# EAGLE board RFID1284 (EAGLE 6.2)
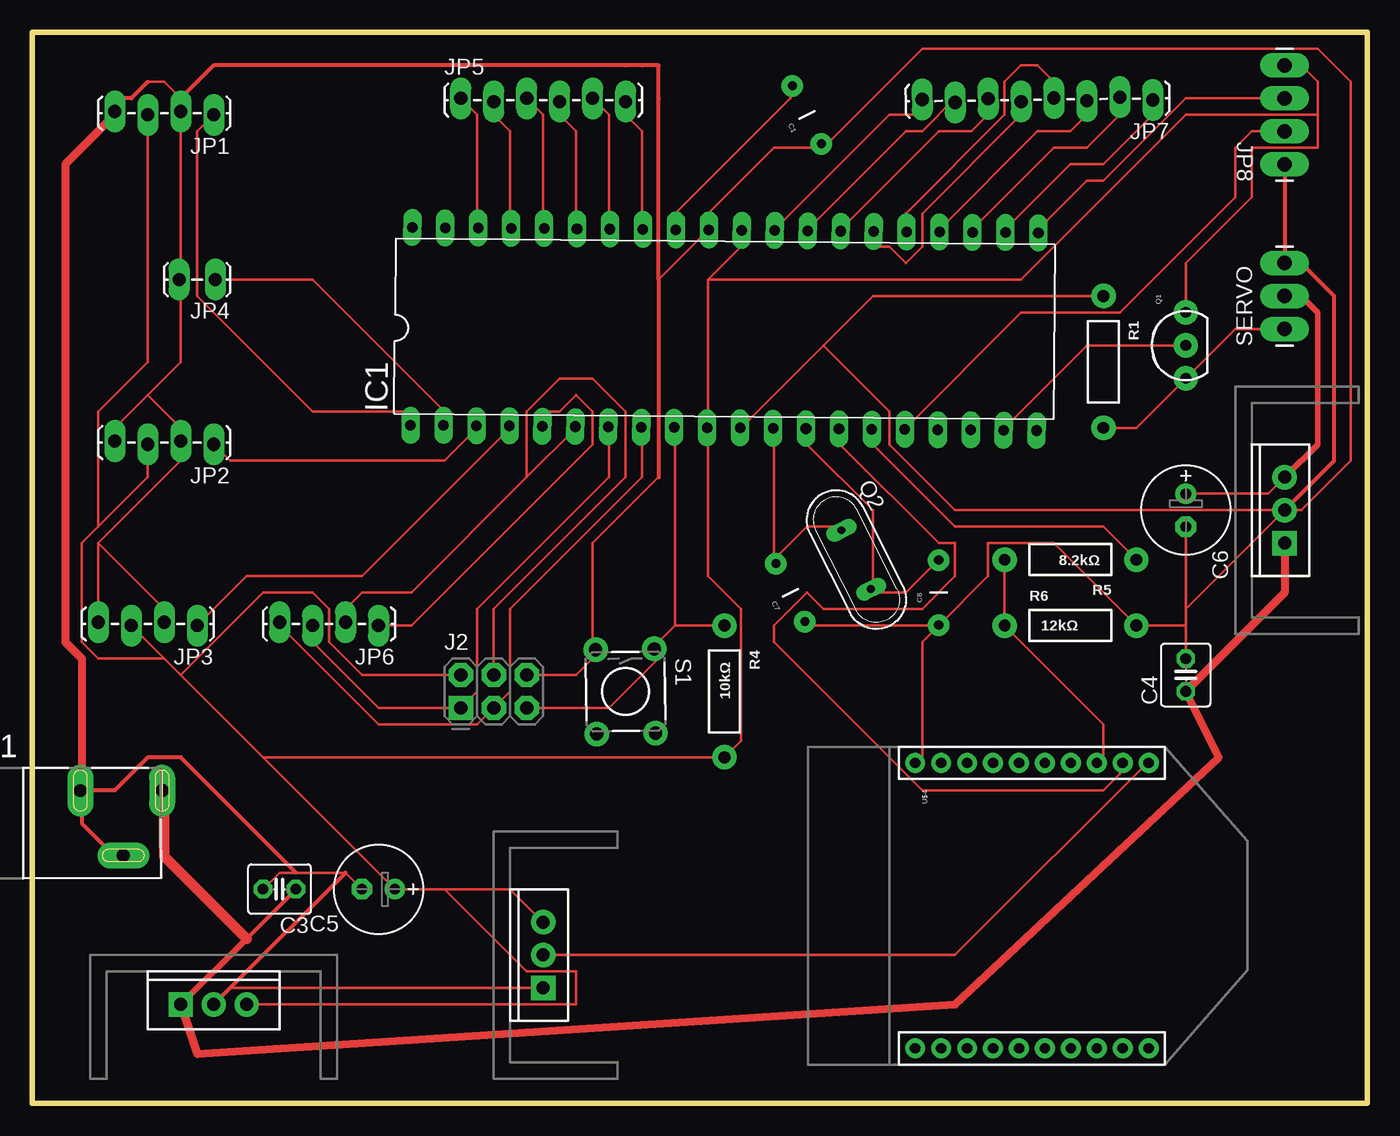
[diagram p0: board, top side]

Size 102.87 x 82.55 mm. Coordinates in mm from the lower left corner, seen from the top.
Outline: 0,82.55 0,0 102.87,0 102.87,82.55 0,82.55
Copper layers (1*16): Top 0.035mm / dielectric 1.5mm / Bottom 0.035mm
Design rules: minimum track width 8mil, minimum drill 20mil, track to track 8mil, track to pad 8mil, pad to pad 8mil, via to via 8mil, smd to smd 8mil, copper to edge 10mil, drill to drill 8mil, minimum pad ring 12mil, minimum via ring 10mil, stop-mask expansion 4mil, vias tented up to drill 25mil, thermal gap 10mil

## Footprints (pad centres in the part's own frame; a part is rotated, then mirrored left to right if it is on the bottom)
CAP-PTH-5MM = drill 0.7 pad 1.651: 1 -2.5,0; 2 2.5,0
C025-040X050 = drill 0.813 octagon: 1 -1.27,0; 2 1.27,0
E2,5-7 = drill 0.813 pad 1.6: + -1.27,0 | drill 0.813 pad 1.6 octagon: - 1.27,0
DIL40 = drill 0.813 long: 1 -24.13,-7.62; 2 -21.59,-7.62; 3 -19.05,-7.62; 4 -16.51,-7.62; 5 -13.97,-7.62; 6 -11.43,-7.62; 7 -8.89,-7.62; 8 -6.35,-7.62; 9 -3.81,-7.62; 10 -1.27,-7.62; 11 1.27,-7.62; 12 3.81,-7.62; 13 6.35,-7.62; 14 8.89,-7.62; 15 11.43,-7.62; 16 13.97,-7.62; 17 16.51,-7.62; 18 19.05,-7.62; 19 21.59,-7.62; 20 24.13,-7.62; 21 24.13,7.62; 22 21.59,7.62; 23 19.05,7.62; 24 16.51,7.62; 25 13.97,7.62; 26 11.43,7.62; 27 8.89,7.62; 28 6.35,7.62; 29 3.81,7.62; 30 1.27,7.62; 31 -1.27,7.62; 32 -3.81,7.62; 33 -6.35,7.62; 34 -8.89,7.62; 35 -11.43,7.62; 36 -13.97,7.62; 37 -16.51,7.62; 38 -19.05,7.62; 39 -21.59,7.62; 40 -24.13,7.62
TO220-IGO = drill 1 pad 1.88: GND 0,0; OUT 2.54,0 | drill 1 pad 1.88 square: IN -2.54,0
POWER_JACK_SLOT = drill 1 pad 2 long: GND@1 2.58,7.5; GND@2 7.58,10.8; PWR 2.58,13.8
2X3-NS = drill 1.016 pad 1.88 square: 1 -2.54,-1.27 | drill 1.016 pad 1.88 octagon: 2 -2.54,1.27; 3 0,-1.27; 4 0,1.27; 5 2.54,-1.27; 6 2.54,1.27
1X04_LOCK_LONGPADS = drill 1.016 long: 1 0,0; 2 2.54,-0.254; 3 5.08,0; 4 7.62,-0.254
1X02_LOCK_LONGPADS = drill 1.016 long: 1 -0.127,0; 2 2.667,0
1X06_LOCK_LONGPADS = drill 1.016 long: 1 0,0; 2 2.54,-0.254; 3 5.08,0; 4 7.62,-0.254; 5 10.16,0; 6 12.7,-0.254
1X08_LOCK_LONGPADS = drill 1.016 long: 1 0,0.127; 2 2.54,-0.127; 3 5.08,0.127; 4 7.62,-0.127; 5 10.16,0.127; 6 12.7,-0.127; 7 15.24,0.127; 8 17.78,-0.127
1X04_LONGPADS = drill 1.118 pad 1.88 long: 1 0,0; 2 2.54,0; 3 5.08,0; 4 7.62,0
TO-92-AMMO = drill 0.813 pad 1.88: 1 -2.54,0; 2 0,0; 3 2.54,0
QS = drill 0.61 long: 1 -2.54,0; 2 2.54,0
AXIAL-0.4 = drill 0.9 pad 1.88: P$1 -5.08,0; P$2 5.08,0
TACTILE-PTH = drill 1.016 pad 1.88: 1 -3.251,2.261; 2 3.251,2.261; 3 -3.251,-2.261; 4 3.251,-2.261
1X03_LONGPADS = drill 1.118 pad 1.88 long: 1 0,0; 2 2.54,0; 3 5.08,0
XBEE-1 = drill 0.8 pad 1.524: 1 -11,20; 2 -11,18; 3 -11,16; 4 -11,14; 5 -11,12; 6 -11,10; 7 -11,8; 8 -11,6; 9 -11,4; 10 -11,2; 11 11,2; 12 11,4; 13 11,6; 14 11,8; 15 11,10; 16 11,12; 17 11,14; 18 11,16; 19 11,18; 20 11,20

## Placement (x,y rotation side)
C1  100nF  [CAP-PTH-5MM]  59.69,76.2 116.6 top
C3  [C025-040X050]  19.05,16.51 180 top
C4  [C025-040X050]  88.9,33.02 90 top
C5  [E2,5-7]  26.67,16.51 180 top
C6  [E2,5-7]  88.9,45.72 270 top
C7  20pF  [CAP-PTH-5MM]  58.42,39.37 116.6 top
C8  20pF  [CAP-PTH-5MM]  69.85,39.37 90 top
IC1  [DIL40]  53.34,59.69 359.5 top
IC2  [TO220-IGO]  13.97,7.62 0 top
IC3  [TO220-IGO]  96.52,45.72 90 top
IC4  [TO220-IGO]  39.37,11.43 90 top
J1  POWER_JACKSLT  [POWER_JACK_SLOT]  -3.81,26.67 270.1 top
J2  AVR_SPI_PRG_6NS  [2X3-NS]  35.56,31.75 0 top
JP1  [1X04_LOCK_LONGPADS]  13.97,76.2 180 top
JP2  [1X04_LOCK_LONGPADS]  13.97,50.8 180 top
JP3  [1X04_LOCK_LONGPADS]  12.7,36.83 180 top
JP4  [1X02_LOCK_LONGPADS]  13.97,63.5 180 top
JP5  [1X06_LOCK_LONGPADS]  33.02,77.47 0 top
JP6  [1X04_LOCK_LONGPADS]  26.67,36.83 180 top
JP7  [1X08_LOCK_LONGPADS]  86.36,77.47 180.7 top
JP8  [1X04_LONGPADS]  96.52,72.39 90.1 top
Q1  [TO-92-AMMO]  88.9,58.42 90 top
Q2  16MHz  [QS]  63.5,41.91 296.8 top
R1  [AXIAL-0.4]  82.55,57.15 270 top
R4  10kΩ  [AXIAL-0.4]  53.34,31.75 270 top
R5  8.2kΩ  [AXIAL-0.4]  80.01,41.91 180 top
R6  12kΩ  [AXIAL-0.4]  80.01,36.83 0 top
S1  [TACTILE-PTH]  45.72,31.75 270.8 top
SERVO  [1X03_LONGPADS]  96.52,59.69 90 top
U$4  XBEE-1B1  [XBEE-1]  66.04,15.24 270 top

## Library data of the parts
C1 C7 C8 IC2-IC4 J1 J2 JP1-JP8 Q1 R1 R4-R6 S1 SERVO U$4 = SparkFun
C3-C6 = rcl
IC1 = 1284p
Q2 = special

## Nets
5V: C5.+ IC1.10 IC1.30 IC2.OUT IC4.OUT J2.2 JP1.3 JP2.3 JP3.3 JP8.4 Q1.3 R4.P$2
DOOR_SWITCH: IC1.2 JP4.1
GND: C1.1 C3.2 C4.2 C5.- C6.- C7.1 C8.1 IC1.11 IC1.31 IC2.GND IC3.GND IC4.IN J1.GND@1 J1.GND@2 J2.6 JP1.2 JP1.4 JP2.2 JP2.4 JP3.2 JP3.4 JP4.2 JP8.1 R1.P$1 R6.P$2 S1.3 SERVO.3 U$4.10
LOCK: IC1.3 JP2.1
LOCK_DELAY: IC1.4 JP3.1
MISO: IC1.7 J2.1 JP6.3
MOSI: IC1.6 J2.4 JP6.2
N$1: C7.2 IC1.12 Q2.1
N$2: C1.2 IC1.32
N$3: C8.2 IC1.13 Q2.2
N$6: IC1.38 JP5.1
N$10: IC1.37 JP5.2
N$11: IC1.36 JP5.3
N$12: IC1.35 JP5.4
N$13: IC1.34 JP5.5
N$14: IC1.33 JP5.6
N$19: IC1.22 JP7.1
N$20: IC1.23 JP7.2
N$21: IC1.24 JP7.3
N$22: IC1.25 JP7.4
N$23: IC1.26 JP7.5
N$24: IC1.27 JP7.6
N$25: IC1.28 JP7.7
N$26: IC1.29 JP7.8
RELAY_RESET: IC1.39
RELAY_SET: IC1.40
RESET: IC1.9 J2.5 R4.P$1 S1.1
RFID_ENABLE: IC1.21 JP8.3
RFID_SERIAL: IC1.16 JP8.2
SCK: IC1.8 J2.3 JP6.4
SERVO: IC1.19 Q1.2
SERVO_OUT: Q1.1 R1.P$2 SERVO.1
SERVO_VCC: C6.+ IC3.OUT SERVO.2
SS: IC1.5 JP6.1
TX0: IC1.15 R5.P$1
TX0_LOW: R5.P$2 R6.P$1 U$4.3
UNLOCK: IC1.1 JP1.1
VCC: IC4.GND U$4.1
VIN: C3.1 C4.1 IC2.IN IC3.IN J1.PWR
XBEE_OUT: IC1.14 U$4.2

## Tracks (layer width: path | path; a pad name or v marks a point on that pad's centre or on a via)
5V
  Top 0.203: Q1.3 88.9,64.77 93.98,69.85 93.98,73.66 99.06,73.66 99.06,76.2 | 99.06,76.2 99.06,78.74 97.79,80.01 JP8.4 | 52.07,63.5 52.07,53.34 IC1.10 52.07,52.07 52.07,40.64 54.61,38.1 54.61,27.94 R4.P$2 17.78,26.67 | 52.07,63.5 54.61,66.04 IC1.30 | 31.75,16.51 36.83,16.51 IC4.OUT | 31.75,16.51 C5.+ 17.78,26.67 | 17.78,26.67 11.43,33.02 | 11.43,33.02 10.16,34.29 | 10.16,34.29 JP3.3 | JP2.3 8.89,48.26 5.08,44.45 | 5.08,44.45 3.81,43.18 3.81,35.56 5.08,34.29 10.16,34.29 | JP1.3 8.89,57.15 5.08,53.34 5.08,44.45 | IC2.OUT 41.91,7.62 41.91,10.16 38.1,10.16 31.75,16.51 | J2.2 25.4,33.02 22.86,35.56 22.86,38.1 21.59,39.37 17.78,39.37 11.43,33.02 | 99.06,76.2 88.9,76.2 76.2,63.5 52.07,63.5
DOOR_SWITCH
  Top 0.203: IC1.2 31.75,53.34 21.59,63.5 JP4.1 13.97,63.5
GND
  Top 0.203: 60.96,58.42 64.77,62.23 R1.P$1 | 60.96,58.42 54.61,52.07 IC1.11 | 69.85,36.83 68.58,35.56 68.58,26.67 U$4.10 | 69.85,36.83 59.69,36.83 C7.1 | C6.- 88.9,38.1 | 88.9,38.1 88.9,36.83 | 88.9,36.83 C4.2 | 88.9,36.83 R6.P$2 78.74,43.18 73.66,43.18 73.66,40.64 69.85,36.83 | 88.9,38.1 IC3.GND | 97.79,64.77 SERVO.3 | 69.85,36.83 C8.1 | 60.96,58.42 66.04,53.34 66.04,50.8 71.12,45.72 IC3.GND | 6.35,19.05 J1.GND@2 | 3.81,22.86 J1.GND@1 3.81,24.13 | C3.2 19.05,17.78 20.32,17.78 24.13,17.78 C5.- | 15.24,8.89 IC4.IN | 5.08,43.18 JP3.4 | 5.08,43.18 11.43,49.53 JP2.2 11.43,52.07 8.89,54.61 | 5.08,43.18 10.16,38.1 JP3.2 | 8.89,78.74 10.16,78.74 11.43,77.47 JP1.2 11.43,63.5 | 6.35,77.47 JP1.4 6.35,76.2 | 8.89,54.61 11.43,57.15 11.43,63.5 | 8.89,54.61 6.35,52.07 JP2.4 | 11.43,63.5 JP4.2 | J2.6 41.91,33.02 43.18,34.29 S1.3 43.18,35.56 43.18,43.18 48.26,48.26 | 60.96,73.66 57.15,73.66 52.07,68.58 IC1.31 52.07,67.31 48.26,63.5 | IC3.GND 97.79,45.72 101.6,49.53 101.6,78.74 99.06,81.28 68.58,81.28 60.96,73.66 | 60.96,73.66 C1.1
  Top 0.305: JP8.1 SERVO.3 | 97.79,64.77 100.33,62.23 100.33,49.53 IC3.GND | 6.35,19.05 3.81,21.59 3.81,22.86 | 24.13,17.78 15.24,8.89 IC2.GND | 3.81,24.13 6.35,24.13 8.89,26.67 11.43,26.67 20.32,17.78 | 6.35,77.47 7.62,77.47 8.89,78.74 | 48.26,48.26 48.26,63.5 48.26,77.47 48.26,80.01 46.99,80.01 45.72,80.01 13.97,80.01 11.43,77.47
  Top 0.61: 3.81,24.13 3.81,34.29 2.54,35.56 2.54,72.39 6.35,76.2
LOCK
  Top 0.203: JP2.1 15.24,49.53 31.75,49.53 34.29,52.07 IC1.3
LOCK_DELAY
  Top 0.203: JP3.1 16.51,40.64 25.4,40.64 36.83,52.07 IC1.4
MISO
  Top 0.203: IC1.7 44.45,52.07 44.45,48.26 34.29,38.1 34.29,31.75 J2.1 26.67,30.48 21.59,35.56 JP6.3
MOSI
  Top 0.203: 38.1,48.26 29.21,39.37 25.4,39.37 24.13,38.1 JP6.2 | 38.1,48.26 41.91,52.07 IC1.6 | J2.4 35.56,38.1 45.72,48.26 45.72,53.34 43.18,55.88 40.64,55.88 38.1,53.34 38.1,48.26
N$1
  Top 0.203: 57.15,41.91 59.69,44.45 62.23,44.45 Q2.1 | 57.15,41.91 57.15,50.8 IC1.12 | 57.15,41.91 C7.2
N$2
  Top 0.203: IC1.32 49.53,68.58 58.42,77.47 58.42,78.74 C1.2
N$3
  Top 0.203: 64.77,39.37 67.31,39.37 69.85,41.91 C8.2 | 64.77,39.37 64.77,45.72 59.69,50.8 IC1.13 | 64.77,39.37 Q2.2
N$6
  Top 0.203: JP5.1 34.29,76.2 34.29,68.58 IC1.38
N$10
  Top 0.203: IC1.37 36.83,68.58 36.83,74.93 35.56,76.2 JP5.2
N$11
  Top 0.203: JP5.3 39.37,76.2 39.37,68.58 IC1.36
N$12
  Top 0.203: IC1.35 41.91,68.58 41.91,74.93 40.64,76.2 JP5.4
N$13
  Top 0.203: JP5.5 44.45,76.2 44.45,68.58 IC1.34
N$14
  Top 0.203: IC1.33 46.99,68.58 46.99,74.93 45.72,76.2 JP5.6
N$19
  Top 0.203: IC1.22 74.93,67.31 80.01,72.39 82.55,72.39 86.36,76.2 JP7.1
N$20
  Top 0.203: IC1.23 72.39,67.31 78.74,73.66 81.28,73.66 83.82,76.2 83.82,77.47 JP7.2
N$21
  Top 0.203: IC1.24 69.85,67.31 77.47,74.93 80.01,74.93 81.28,76.2 JP7.3
N$22
  Top 0.203: IC1.25 67.31,67.31 67.31,68.58 74.93,76.2 74.93,78.74 76.2,80.01 77.47,80.01 78.74,78.74 JP7.4
N$23
  Top 0.203: IC1.26 64.77,66.04 66.04,66.04 67.31,64.77 68.58,66.04 68.58,68.58 76.2,76.2 JP7.5
N$24
  Top 0.203: IC1.27 62.23,67.31 69.85,74.93 72.39,74.93 73.66,76.2 JP7.6
N$25
  Top 0.203: IC1.28 59.69,67.31 67.31,74.93 68.58,74.93 71.12,77.47 JP7.7
N$26
  Top 0.203: IC1.29 57.15,67.31 66.04,76.2 68.58,76.2 JP7.8
RESET
  Top 0.203: 49.53,36.83 49.53,52.07 IC1.9 | 49.53,36.83 48.26,35.56 S1.1 48.26,34.29 44.45,30.48 J2.5 | 49.53,36.83 R4.P$1
RFID_ENABLE
  Top 0.203: IC1.21 77.47,67.31 81.28,71.12 82.55,71.12 88.9,77.47 95.25,77.47 JP8.3
RFID_SERIAL
  Top 0.203: IC1.16 67.31,52.07 76.2,60.96 83.82,60.96 92.71,69.85 92.71,73.66 93.98,74.93 95.25,74.93 JP8.2
SCK
  Top 0.203: IC1.8 46.99,52.07 46.99,48.26 36.83,38.1 36.83,31.75 J2.3 34.29,29.21 26.67,29.21 19.05,36.83 JP6.4
SERVO
  Top 0.203: Q1.2 81.28,58.42 74.93,52.07 IC1.19
SERVO_OUT
  Top 0.203: R1.P$2 85.09,52.07 Q1.1 92.71,59.69 SERVO.1
SERVO_VCC
  Top 0.203: C6.+ 95.25,46.99 IC3.OUT | 97.79,62.23 SERVO.2
  Top 0.406: 97.79,62.23 99.06,60.96 99.06,50.8 IC3.OUT
SS
  Top 0.203: JP6.1 29.21,36.83 43.18,50.8 43.18,53.34 41.91,54.61 40.64,53.34 39.37,53.34 IC1.5
TX0
  Top 0.203: R5.P$1 82.55,44.45 71.12,44.45 64.77,50.8 IC1.15
TX0_LOW
  Top 0.203: U$4.3 82.55,26.67 82.55,29.21 R6.P$1 R5.P$2
UNLOCK
  Top 0.203: JP1.1 12.7,74.93 12.7,62.23 21.59,53.34 29.21,53.34 IC1.1
VCC
  Top 0.203: IC4.GND 71.12,11.43 86.36,26.67 U$4.1
VIN
  Top 0.203: 10.16,22.86 J1.PWR
  Top 0.305: 16.51,12.7 C3.1
  Top 0.406: IC2.IN 16.51,12.7
  Top 0.61: IC3.IN 96.52,39.37 C4.1 91.44,26.67 71.12,7.62 12.7,3.81 IC2.IN
  Top 0.813: 10.16,22.86 10.16,19.05 16.51,12.7
XBEE_OUT
  Top 0.203: IC1.14 62.23,50.8 69.85,43.18 71.12,43.18 71.12,40.64 68.58,38.1 60.96,38.1 59.69,39.37 57.15,36.83 57.15,35.56 68.58,24.13 82.55,24.13 83.82,25.4 83.82,26.67 U$4.2